# Altium PCB McuProFinal.PcbDoc
Units mil, origin at the board's own origin, x right, y up, seen from the top; angles counter-clockwise.
Board outline 3025 x 3900 mil, 2 copper layers (Top Layer, Bottom Layer); 34 components, 101 nets, 286 pads, 34 vias.
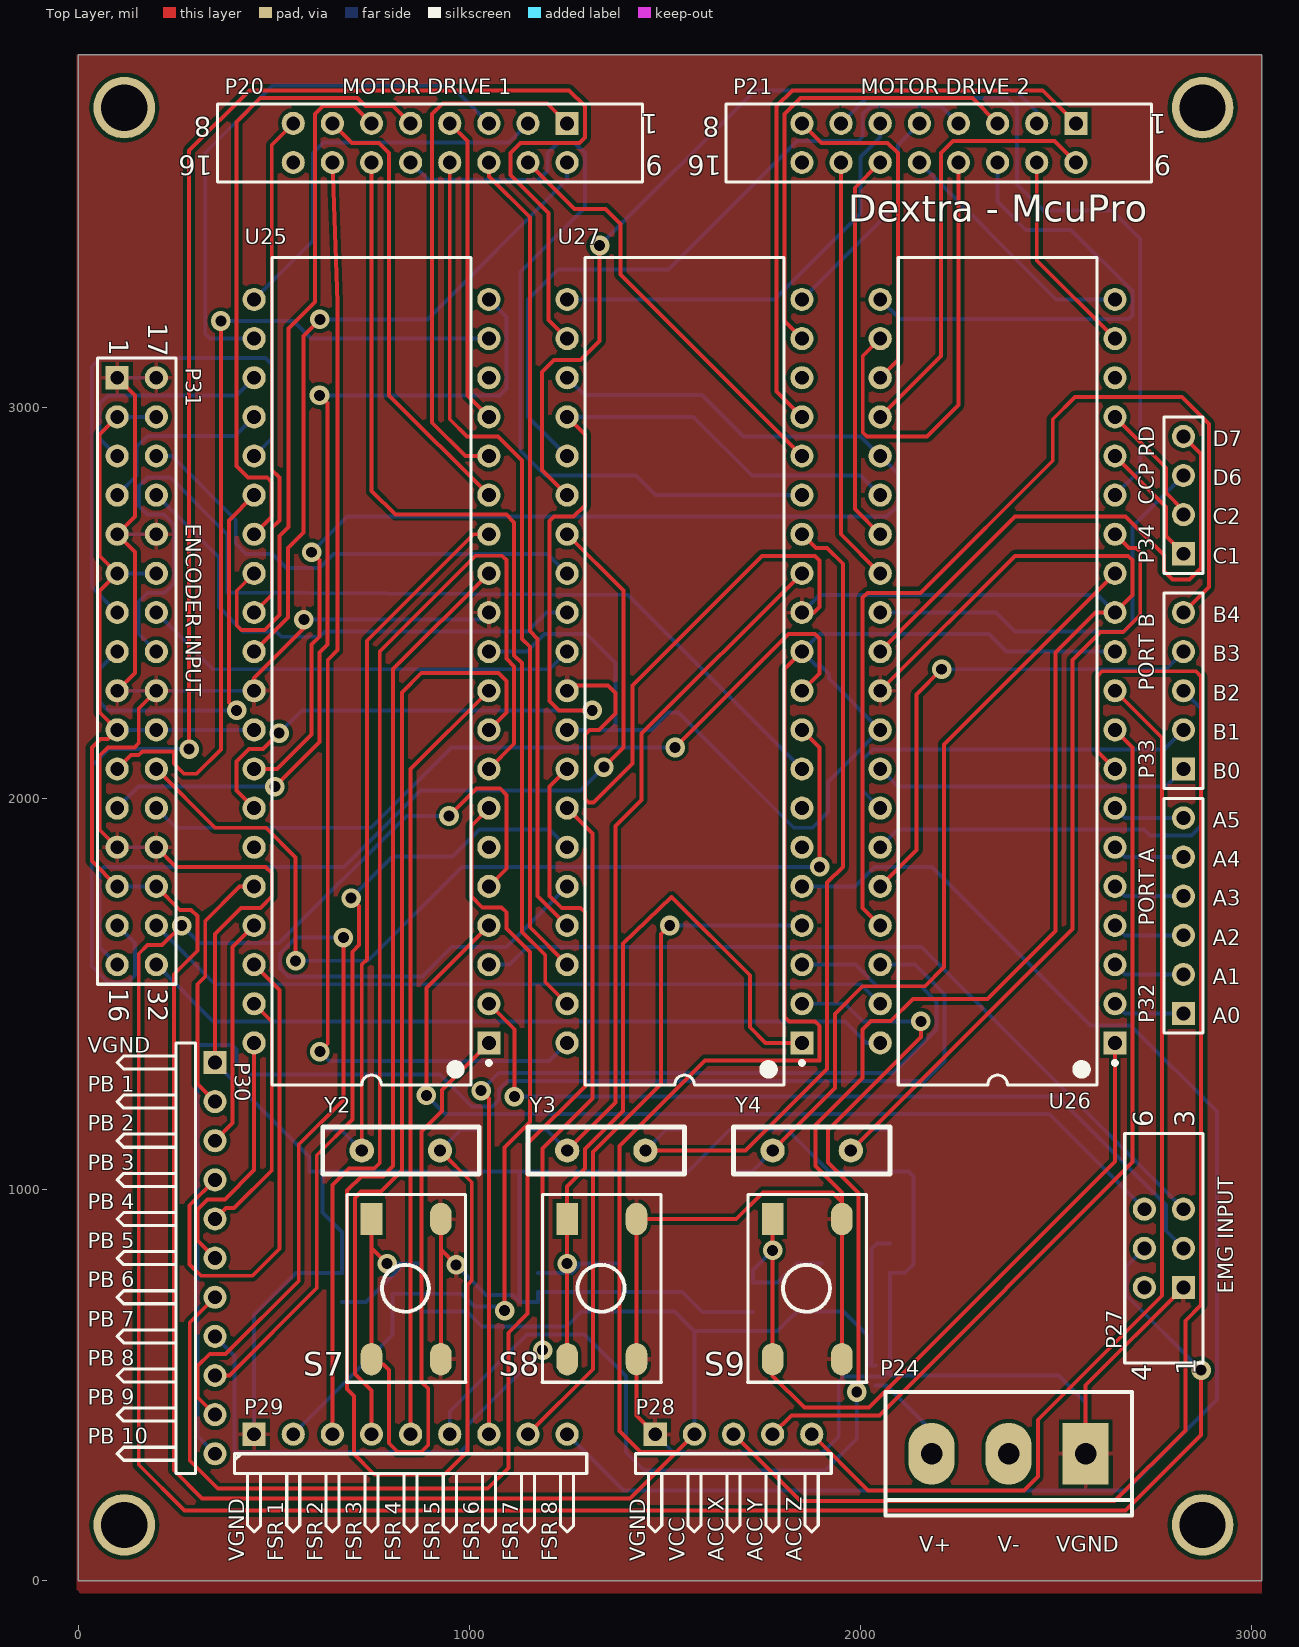
[diagram p0: Top Layer view]
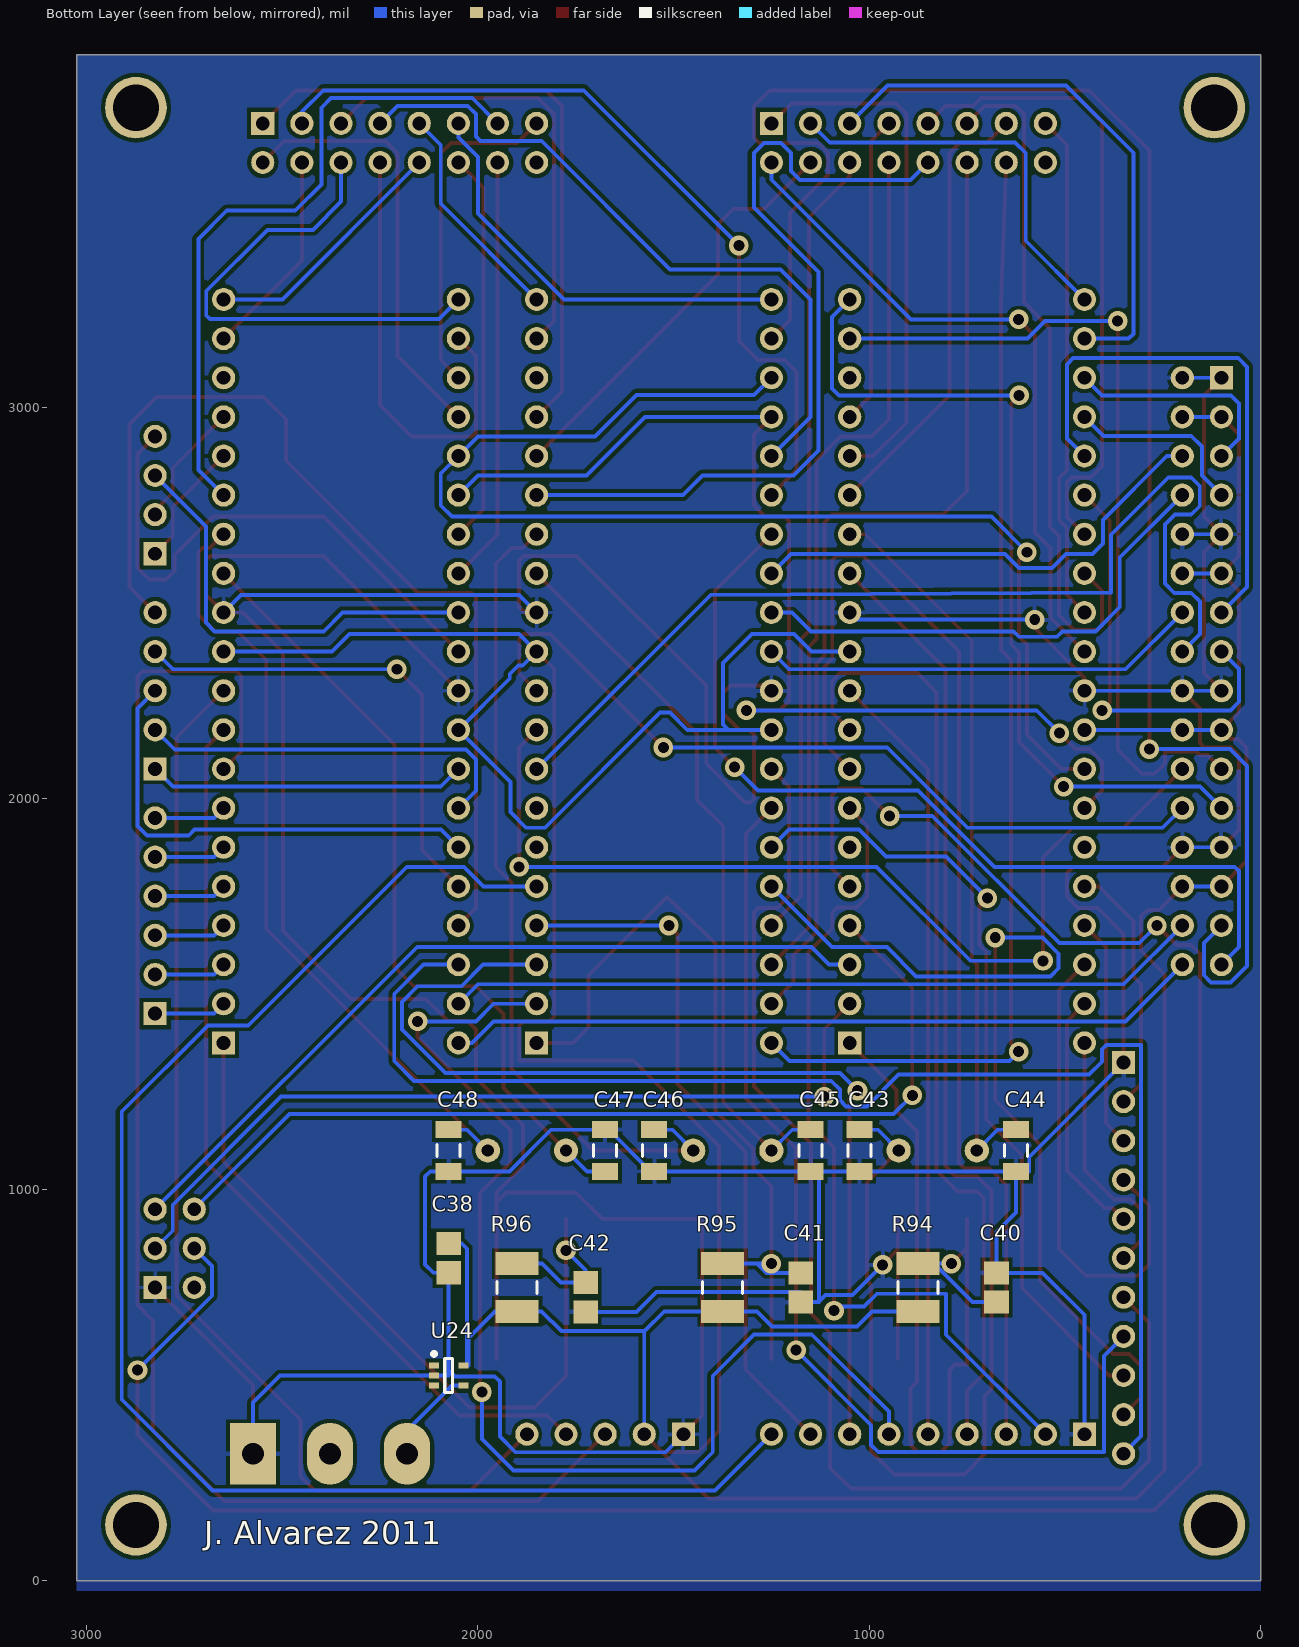
[diagram p1: Bottom Layer view, seen from below]

## Layer stack, top to bottom
Top Layer: signal copper 1.4
Dielectric: dielectric 12.6, FR-4, Dk 4.8
Bottom Layer: signal copper 1.4

## Board outline
0,0 3025,0 3025,3900 0,3900 0,0

## Design rules (kind name [scope] priority, off if disabled: settings)
Clearance [All] p1: gap=10
PolygonConnect [All] p1: connectstyle=Relief reliefconductorwidth=10 reliefentries=4 polygonreliefangle="90 Angle"
RoomDefinition McuPro [InComponentClass('McuPro')] p1: confinementstyle=ConfineIn formatcopy=TRUE lockcomponents=FALSE outline -2.95,-31.1 3025,-31.1 3025,3900 -2.95,3900
RoutingVias [All] p1: holewidth=28 width=50 viastyle="Through Hole" minholewidth=28 minwidth=50 maxholewidth=28 maxwidth=50
SilkToSilkClearance [All] p1: silktosilkclearance=0
SilkscreenOverComponentPads [All] p1: minsilkscreentomaskgap=10
SolderMaskExpansion [All] p1: expansion=4
ViasUnderSMD [All] p1: allowed=FALSE
Width [All] p1: maxlimit=10 minlimit=10 preferedwidth=10
26 further rules are at their usual default settings.

## Components (designator, comment, footprint, x,y, rotation, side; value= is the part's Value field where it differs from the comment)
C38 "Cap Semi" CAPC2012M 2075,825 r270 bottom
C40 "Cap Semi" CAPC2012M 675,750 r90 bottom
C41 "Cap Semi" CAPC2012M 1175,750 r270 bottom
C42 "Cap Semi" CAPC2012M 1725,725 r270 bottom
C43 "Cap Semi" C1206 1025,1100 r270 bottom
C44 "Cap Semi" C1206 625,1100 r270 bottom
C45 "Cap Semi" C1206 1150,1100 r270 bottom
C46 "Cap Semi" C1206 1550,1100 r270 bottom
C47 "Cap Semi" C1206 1675,1100 r90 bottom
C48 "Cap Semi" C1206 2075,1100 r270 bottom
P20 "SHEADER 2x8" "SHBH 2X8" 1250,3725 r180 top
P21 "SHEADER 2x8" "SHBH 2X8" 2550,3725 r180 top
P24 "VIN" AZUL5-3 2575,325 r180 top
P27 "EMG IN" "SHBH 2x3" 2825,750 r90 top
P28 "ACC SENS" HDR1X5H 1475,375 r0 top
P29 "FSR IN" HDR1X9H 450,375 r0 top
P30 "PB IN" HDR1X11H 350,1325 r270 top
P31 "ENC IN" HDR2X16_CEN 100,3075 r270 top
P32 "RA PORT" HDR1X6 2825,1450 r90 top
P33 "RB PORT" HDR1X5 2825,2075 r90 top
P34 "CCP RD" HDR1X4 2825,2625 r90 top
R94 "Res3" RESC3225M 875,750 r90 bottom
R95 "Res3" RESC3225M 1375,750 r90 bottom
R96 "Res3" RESC3225M 1900,750 r90 bottom
S7 "SW BT SMT" "PBOTTON SMT4" 750,925 r0 top
S8 "SW BT SMT" "PBOTTON SMT4" 1250,925 r0 top
S9 "SW BT SMT" "PBOTTON SMT4" 1775,925 r0 top
U24 "TPS71550" SOT353-5L 2075,525 r180 bottom
U25 "PIC18F4553-I/P" PDIP600-P40 750,2325 r180 top
U26 "PIC18F4553-I/P" PDIP600-P40 2350,2325 r180 top
U27 "PIC18F4553-I/P" PDIP600-P40 1550,2325 r180 top
Y2 "XTAL" XTAL-1 925,1100 r180 top
Y3 "XTAL" XTAL-1 1250,1100 r0 top
Y4 "XTAL" XTAL-1 1775,1100 r0 top

## Footprints (in the part's own frame and the unit in brackets; to place one, negate y for a bottom-side part, rotate by r counter-clockwise, add the part's x,y. Pads: shape width x height; smd on the part's side, far side on the other; paste and mask are expansions set on the pad)
AZUL5-3 [mm]
  rect 3x4 hole 1.4: 1(0,0)
  oval 3x4 hole 1.4: 2(5,0) 3(10,0)
  silkscreen extent -3,-4 13,4
C1206 [mm] "Chip Capacitor, Body 3.2x1.6mm, IPC High Density"
  rect 1.1x1.7 smd: 1(-1.35,0) 2(1.35,0)
  silkscreen extent -0.4,-0.75 0.4,0.75, body extent -1.7,-0.9 1.7,0.9, height 1.3
CAPC2012M [mm] "Chip Capacitor, Body 2.0x1.3mm, IPC Low Density"
  rect 1.5x1.6 smd: 1(-0.95,0) 2(0.95,0)
  body extent -1.1,-0.72 1.1,0.72, height 1.1
HDR1X4 [mm] "Connector; Header; 4 Position"
  rect 1.5x1.5 hole 0.9: 1(0,0)
  round 1.5 hole 0.9: 2(2.54,0) 3(5.08,0) 4(7.62,0)
  silkscreen extent -1.27,-1.27 8.89,1.27
HDR1X5 [mm] "Connector; Header; 5 Position"
  rect 1.5x1.5 hole 0.9: 1(0,0)
  round 1.5 hole 0.9: 2(2.54,0) 3(5.08,0) 4(7.62,0) 5(10.16,0)
  silkscreen extent -1.27,-1.27 11.43,1.27
HDR1X5H [mm] "Connector; Header; 5 Position; Right Angle"
  rect 1.5x1.5 hole 0.9: 1(0,0)
  round 1.5 hole 0.9: 2(2.54,0) 3(5.08,0) 4(7.62,0) 5(10.16,0)
  silkscreen extent -1.27,-6.35 11.43,-1.27
HDR1X6 [mm] "Connector; Header; 6 Position"
  rect 1.5x1.5 hole 0.9: 1(0,0)
  round 1.5 hole 0.9: 2(2.54,0) 3(5.08,0) 4(7.62,0) 5(10.16,0) 6(12.7,0)
  silkscreen extent -1.27,-1.27 13.97,1.27
HDR1X9H [mm] "Connector; Header; 9 Position; Right Angle"
  rect 1.5x1.5 hole 0.9: 1(0,0)
  round 1.5 hole 0.9: 2(2.54,0) 3(5.08,0) 4(7.62,0) 5(10.16,0) 6(12.7,0) 7(15.24,0) 8(17.78,0) 9(20.32,0)
  silkscreen extent -1.27,-6.35 21.59,-1.27
HDR1X11H [mm] "Connector; Header; 11 Position; Right Angle"
  rect 1.5x1.5 hole 0.9: 1(0,0)
  round 1.5 hole 0.9: 2(2.54,0) 3(5.08,0) 4(7.62,0) 5(10.16,0) 6(12.7,0) 7(15.24,0) 8(17.78,0) 9(20.32,0) 10(22.86,0) 11(25.4,0)
  silkscreen extent -1.27,-6.35 26.67,-1.27
HDR2X16_CEN [mm] "Connector; Header; 16x2 Position"
  rect 1.5x1.5 hole 0.9: 1(0,0)
  round 1.5 hole 0.9: 2(2.54,0) 3(5.08,0) 4(7.62,0) 5(10.16,0) 6(12.7,0) 7(15.24,0) 8(17.78,0) 9(20.32,0) 10(22.86,0) 11(25.4,0) 12(27.94,0) 13(30.48,0) 14(33.02,0) 15(35.56,0) 16(38.1,0) 17(0,2.54) 18(2.54,2.54) 19(5.08,2.54) 20(7.62,2.54) 21(10.16,2.54) 22(12.7,2.54) 23(15.24,2.54) 24(17.78,2.54) 25(20.32,2.54) 26(22.86,2.54) 27(25.4,2.54) 28(27.94,2.54) 29(30.48,2.54) 30(33.02,2.54) 31(35.56,2.54) 32(38.1,2.54)
  silkscreen extent -1.27,-1.27 39.37,3.81
"PBOTTON SMT4" [mm]
  oval 1.4x2.1 smd: 1(0,-9.1) 2(4.5,-9.1) 2(4.5,0)
  rect 1.4x2.1 smd: 1(0,0)
  silkscreen extent -1.6,-10.6 6.1,1.6
PDIP600-P40 [mm] "DIP, 40-Leads, Row Spacing 15.24mm, Pitch 2.54mm, Body 51.8x13.5mm"
  rect 1.5x1.5 hole 0.9: 1(-7.62,24.13)
  round 1.5 hole 0.9: 2(-7.62,21.59) 3(-7.62,19.05) 4(-7.62,16.51) 5(-7.62,13.97) 6(-7.62,11.43) 7(-7.62,8.89) 8(-7.62,6.35) 9(-7.62,3.81) 10(-7.62,1.27) 11(-7.62,-1.27) 12(-7.62,-3.81) 13(-7.62,-6.35) 14(-7.62,-8.89) 15(-7.62,-11.43) 16(-7.62,-13.97) 17(-7.62,-16.51) 18(-7.62,-19.05) 19(-7.62,-21.59) 20(-7.62,-24.13) 21(7.62,-24.13) 22(7.62,-21.59) 23(7.62,-19.05) 24(7.62,-16.51) 25(7.62,-13.97) 26(7.62,-11.43) 27(7.62,-8.89) 28(7.62,-6.35) 29(7.62,-3.81) 30(7.62,-1.27) 31(7.62,1.27) 32(7.62,3.81) 33(7.62,6.35) 34(7.62,8.89) 35(7.62,11.43) 36(7.62,13.97) 37(7.62,16.51) 38(7.62,19.05) 39(7.62,21.59) 40(7.62,24.13)
  silkscreen extent -7.75,-26.85 6.45,26.85, body extent -7.3,-26.85 7.3,26.85, height 6.35
RESC3225M [mm] "Chip Resistor, Body 3.2x2.5mm, IPC Low Density"
  rect 1.5x2.8 smd: 1(-1.55,0) 2(1.55,0)
  silkscreen extent -0.4,-1.3 0.4,1.3, body extent -1.68,-1.32 1.68,1.32, height 0.71
"SHBH 2x3" [mm] "Shrouded Box Header: 2x3-Pin, 0.100\" (2.54 mm) Male"
  rect 1.5x1.5 hole 0.9: 1(0,0)
  round 1.5 hole 0.9: 2(2.54,0) 3(5.08,0) 4(0,2.54) 5(2.54,2.54) 6(5.08,2.54)
  silkscreen extent -4.9,-1.27 10,3.81
"SHBH 2X8" [mm] "Shrouded Box Header: 2x8-Pin, 0.100\" (2.54 mm) Male"
  rect 1.5x1.5 hole 0.9: 1(0,0)
  round 1.5 hole 0.9: 2(2.54,0) 3(5.08,0) 4(7.62,0) 5(10.16,0) 6(12.7,0) 7(15.24,0) 8(17.78,0) 9(0,2.54) 10(2.54,2.54) 11(5.08,2.54) 12(7.62,2.54) 13(10.16,2.54) 14(12.7,2.54) 15(15.24,2.54) 16(17.78,2.54)
  silkscreen extent -4.9,-1.27 22.7,3.81
SOT353-5L [mm] "SOT353, 5-Leads, Body 2x1.3mm, Pitch 0.65mm, Lead Span 2.1mm, IPC High Density"
  rect 0.65x0.4 smd: 1(-0.95,0.65) 2(-0.95,0) 3(-0.95,-0.65) 4(0.95,-0.65) 5(0.95,0.65)
  silkscreen extent -1.07,-1.1 0.25,1.52, body extent -0.7,-1.1 0.7,1.1, height 1.1
XTAL-1 [mil]
  round 62 hole 31.5: 1(0,0) 2(200,0)
  silkscreen extent -100,-60 300,60

## Part data
C38 C40 C41 C42 C43 C44 C45 C46 C47 C48: "Capacitor (Semiconductor SIM Model)"
P20 P21: library part "SB Header 2x8", "Shrouded Box Header: 2x8-Pin, 0.100\" (2.54 mm) Male"
P24: library part "Header 3", "Header, 3-Pin"
P27: library part "SB Header 2x3", "Shrouded Box Header: 2x8-Pin, 0.100\" (2.54 mm) Male"
P28: library part "Header 5H", "Header, 5-Pin, Right Angle"
P29: library part "Header 9H", "Header, 9-Pin, Right Angle"
P30: library part "Header 11H", "Header, 11-Pin, Right Angle"
P31: library part "Header 16X2A", "Header, 16-Pin, Dual row"
P32: library part "Header 6", "Header, 6-Pin"
P33: library part "Header 5", "Header, 5-Pin"
P34: library part "Header 4", "Header, 4-Pin"
R94 R95 R96: "Resistor"
S7 S8 S9: library part "SW PB 6mm", "Pushbutton Switches FSM2JSMAASTR=6MM TACT SWITCH,"
U25 U26 U27: "High Performance, Enhanced Flash, USB Microcontroller with 12-Bit A/D and nanoWatt Technology, 32K Flash, 40-Pin PDIP, Industrial Temperature Range"
Y2 Y3 Y4: "Crystal Oscillator"

## Free pads (board coordinates)
  round 157.48 hole 118.11: 0(118.11,143.11) 2(118.11,3765.16) 3(2874.02,3765.16) 4(2874.02,143.11)

## Via types
v1: diameter 50, hole 28, Top Layer to Bottom Layer, 34 vias

## Nets (pads, with @x,y where several pads share a name; then routed paths per layer and width w, separated by ;. In a path a pad name is that pad's centre, name@x,y a point inside that pad or via, vN(x,y) a via of type N, cw(c..) or ccw(c..) an arc to the next point about the centre after c; other vN are vias at no path point)
"ACC X": P28.3 U26.8 | length 3776.3
  Top Layer w10: P28.3 1846.1,203.9 2649.05,203.9 2830.05,384.9 2830.05,665 2870.05,705 2870.05,2311.9 2857.05,2324.9 2617.05,2324.9 2605.05,2312.9 2605.05,2119.95 U26.8
"ACC Y": P28.4 U26.9 | length 2331.5
  Top Layer w10: P28.4 1822.9,422.9 2047.8,422.9 2695.05,1070.14 2695.05,2129.95 U26.9
"ACC Z": P28.5 U26.10 | length 2841.8
  Top Layer w10: P28.5 2019.1,230.9 2417.05,230.9 2453.05,266.9 2453.05,411.9 2770.05,728.9 2770.05,2154.95 U26.10
EMGCH1: P27.2 U25.2 | length 2173.3
  Top Layer w10: U25.2 1115.05,1409.95 v1(1115.05,1237.9)
  Bottom Layer w10: v1(1115.05,1237.9) 2503.05,1237.9 2780.05,960.9 2780.05,894.95 P27.2
EMGCH2: P27.3 U25.3 | length 2071.1
  Bottom Layer w10: U25.3 1103.15,1575 1148.05,1619.9 2155.1,1619.9 P27.3
EMGCH3: P27.6 U25.4 | length 2455.8
  Top Layer w10: v1(890.05,1240.9) 890.05,1515.05 U25.4
  Bottom Layer w10: v1(890.05,1240.9) 938.05,1192.9 2482.1,1192.9 P27.6
EMGCH4: P27.5 U25.5 | length 6135.1
  Top Layer w10: v1(265.05,1674.9) 215.05,1624.9 177.05,1624.9 155.05,1602.9 155.05,296.9 272.05,179.9 2677.05,179.9 2870.05,372.9 v1(2870.05,538.9) ; v1(948.05,1954.9) 1018.05,2024.9 1079.05,2024.9 1095.05,2008.9 1095.05,1820.05 U25.5
  Bottom Layer w10: v1(265.05,1674.9) 310.05,1629.9 514.05,1629.9 839.05,1954.9 v1(948.05,1954.9) ; P27.5 2680.05,805.05 2680.05,728.9 v1(2870.05,538.9)
EN1CHA: P31.3 U25.23 | length 574.9
  Bottom Layer w10: P31.3 55.05,2919.95 55.05,3008.9 76.05,3029.9 404.9,3029.9 U25.23
EN1CHB: P31.4 U25.24 | length 476.1
  Bottom Layer w10: P31.4 150.05,2825.05 150.05,2898.9 177.05,2925.9 400.9,2925.9 U25.24
EN2CHA: P31.7 U25.25 | length 1383.1
  Bottom Layer w10: P31.7 35.05,2539.95 35.05,3102.9 57.05,3124.9 479.05,3124.9 495.05,3108.9 495.05,2920.05 U25.25
EN2CHB: P31.8 U25.26 | length 1090.8
  Top Layer w10: v1(405.05,2224.9) 385.47,2244.47 385.47,2710.47 U25.26
  Bottom Layer w10: P31.8 55.05,2330.05 55.05,2246.9 77.05,2224.9 v1(405.05,2224.9)
EN3CHA: P31.11 U25.19 | length 2149.1
  Top Layer w10: P31.11 135.47,2110.47 155.1,2110.47 164.53,2119.9 243.53,2119.9 244.53,2118.9 244.53,2088.9 270.53,2062.9 303.05,2062.9 365.05,2124.9 v1(365.05,3219.9)
  Bottom Layer w10: v1(365.05,3219.9) 550.92,3219.9 595.82,3175 U25.19
EN3CHB: P31.12 U25.20 | length 2220.8
  Top Layer w10: v1(503.05,2029.9) 617.05,2143.9 617.05,2373.09 637.05,2393.09 637.05,3009.9 v1(617.05,3029.9)
  Bottom Layer w10: P31.12 154.9,2029.9 v1(503.05,2029.9) ; v1(617.05,3029.9) 1077.05,3029.9 1095.05,3047.9 1095.05,3229.95 U25.20
EN4CHA: P31.15 U27.22 | length 4500.4
  Top Layer w10: v1(284.05,2125.9) 284.05,3655.9 437.68,3809.53 1254.42,3809.53 1295.05,3768.9 1295.05,3688.9 1281.05,3674.9 1131.05,3674.9 1105.05,3648.9 1105.05,3592.9 1202.05,3495.9 1202.05,3222.95 U27.22
  Bottom Layer w10: P31.15 145.05,1629.95 145.05,1547.9 127.05,1529.9 77.05,1529.9 35.05,1571.9 35.05,2082.9 78.05,2125.9 v1(284.05,2125.9)
EN4CHB: P31.16 U27.27 | length 2332.2
  Top Layer w10: U27.27 1394.05,2530.95 1394.05,2129.9 v1(1344.05,2079.9)
  Bottom Layer w10: P31.16 55.05,1619.95 55.05,1813.9 66.05,1824.9 680.05,1824.9 875.05,2019.9 1284.05,2019.9 v1(1344.05,2079.9)
EN5CHA: P31.19 U27.28 | length 1239.7
  Bottom Layer w10: P31.19 239.76,2875 403.03,2711.73 403.03,2650.92 429.05,2624.9 497.05,2624.9 533.05,2588.9 617.05,2588.9 653.05,2624.9 1200.1,2624.9 U27.28
EN5CHB: P31.20 U27.29 | length 1299.5
  Bottom Layer w10: P31.20 359.95,2615.05 359.95,2488.9 421.95,2426.9 506.14,2426.9 519.95,2413.09 617.05,2413.09 630.86,2426.9 1149.05,2426.9 1197.15,2475 U27.29
EN6CHA: P31.23 U27.30 | length 1128.8
  Bottom Layer w10: P31.23 345.1,2329.9 1204.9,2329.9 U27.30
EN6CHB: P31.24 U27.8 | length 2662.1
  Bottom Layer w10: P31.24 155.05,2419.95 155.05,2502.9 177.05,2524.9 220.53,2524.9 244.53,2548.9 244.53,2699.42 219.05,2724.9 177.05,2724.9 155.47,2746.47 155.47,2798.32 177.05,2819.9 235.88,2819.9 382.05,2673.73 382.05,2525.9 1405.1,2519.9 U27.8
EN7CHA: P31.27 U27.9 | length 2520.9
  Top Layer w10: P31.27 350.1,1924.9 480.05,1924.9 556.05,1848.9 v1(556.05,1584.9) ; U27.9 1895.05,2129.95 v1(1895.05,1824.9)
  Bottom Layer w10: v1(556.05,1584.9) 741.05,1584.9 981.05,1824.9 v1(1895.05,1824.9)
EN7CHB: P31.28 U27.10 | length 2077.2
  Top Layer w10: v1(1526.05,2129.9) 1816.05,2419.9 1883.53,2419.9 1894.53,2408.9 1894.53,2319.53 U27.10
  Bottom Layer w10: P31.28 250.1,1924.9 749.05,1924.9 954.05,2129.9 v1(1526.05,2129.9)
EN8CHA: P31.31 U26.39 | length 1932.8
  Bottom Layer w10: P31.31 350.1,1524.9 2000.1,1524.9 U26.39
EN8CHB: P31.32 U26.40 | length 1932.8
  Bottom Layer w10: P31.32 345.1,1429.9 1960.57,1429.9 2015.47,1375 U26.40
EN11: P20.1 U25.16 | length 1346.3
  Top Layer w10: U25.16 990.05,2875 905.05,2960 905.05,3748.9 932.05,3775.9 1199.1,3775.9 P20.1
EN12: P20.4 U25.17 | length 791.4
  Top Layer w10: P20.4 995.05,3679.95 995.05,3029.95 U25.17
EN21: P20.7 U25.15 | length 1156.1
  Top Layer w10: P20.7 700.1,3674.9 769.05,3674.9 795.05,3648.9 795.05,3029.95 U25.15
EN22: P20.10 U27.16 | length 1086
  Top Layer w10: P20.10 1268.89,3506.11 1347.54,3506.11 1386.19,3467.47 1386.19,3338.81 U27.16
EN31: P20.13 U27.15 | length 2136.3
  Bottom Layer w10: P20.13 895.1,3579.9 1177.05,3579.9 1200.05,3602.9 1200.05,3648.9 1226.05,3674.9 1269.05,3674.9 1295.05,3648.9 1295.05,3509.9 1130.05,3344.9 1130.05,2888.9 1194.05,2824.9 1426.15,2824.9 1476.05,2775 U27.15
EN32: P21.1 U27.17 | length 1637
  Top Layer w10: U27.17 1785.47,3039.53 1785.47,3768.9 1826.1,3809.53 2465.47,3809.53 P21.1
EN41: P21.4 U27.25 | length 1798.3
  Bottom Layer w10: U27.25 1150.05,2974.95 1150.05,3274.9 1227.05,3351.9 1509.05,3351.9 1837.05,3679.9 1994.05,3679.9 2005.47,3691.32 2005.47,3748.9 2026.1,3769.53 2205.47,3769.53 P21.4
EN42: P21.7 U26.15 | length 1736.4
  Bottom Layer w10: P21.7 2014.53,3789.53 2375.42,3789.53 2400.05,3764.9 2400.05,3568.9 2467.05,3501.9 2642.05,3501.9 2714.53,3429.42 2714.53,2839.53 U26.15
EN51: P21.10 U26.19 | length 532.8
  Top Layer w10: P21.10 2450,3375 U26.19
EN52: P21.13 U26.20 | length 645
  Bottom Layer w10: P21.13 2500,3275 U26.20
FSR1: P29.2 U25.7 | length 2188.7
  Top Layer w10: U25.7 1005.05,1930.05 1005.05,1748.9 1033.05,1720.9 1082.53,1720.9 1094.53,1708.9 1094.53,1667.9 1155.05,1607.38 1155.05,1172.9 1090.05,1107.9 v1(1090.05,690.9)
  Bottom Layer w10: P29.2 804.05,629.05 804.05,733.9 980.05,733.9 1013.05,700.9 1080.05,700.9 v1(1090.05,690.9)
FSR2: P29.3 U25.8 | length 3086.5
  Top Layer w10: P29.3 650,1011.85 692.15,1054 757.05,1054 771,1067.95 771,2374.85 1016.05,2619.9 1083.53,2619.9 1094.53,2608.9 1094.53,2356.9 1114.53,2336.9 1114.53,2139.53 U25.8
FSR3: P29.4 U25.9 | length 2431.5
  Top Layer w10: P29.4 750,486.34 707.44,528.9 707.44,978.9 723.44,994.9 774.05,994.9 828.05,1048.9 828.05,2270.9 877.05,2319.9 1074.53,2319.9 1094.53,2299.9 1094.53,2219.53 U25.9
FSR4: P29.5 U25.10 | length 1982.8
  Top Layer w10: P29.5 850,2075 U25.10
FSR5: P29.6 U27.2 | length 2993.7
  Top Layer w10: v1(1990.05,482.9) 1995.05,487.9 1995.05,990.9 1917.05,1068.9 1917.05,1152.9 2154.05,1389.9 v1(2154.05,1429.9)
  Bottom Layer w10: P29.6 950,432.85 1147.05,629.9 1294.05,629.9 1400.05,523.9 1400.05,328.9 1447.05,281.9 1909.05,281.9 1990.05,362.9 v1(1990.05,482.9) ; U27.2 1960.37,1475 2005.47,1429.9 v1(2154.05,1429.9)
FSR6: P29.7 U27.3 | length 2569.2
  Top Layer w10: v1(1030.05,1252.9) 1050,1232.95 P29.7
  Bottom Layer w10: v1(1030.05,1252.9) 1075.05,1297.9 2083.05,1297.9 2194.05,1408.9 2194.05,1479.9 2154.05,1519.9 2042.05,1519.9 1986.95,1575 U27.3
FSR7: P29.8 U27.4 | length 1787.9
  Top Layer w10: P29.8 1316,541 1316,1095.85 1490.05,1269.9 1490.05,1652.9 v1(1512.15,1675)
  Bottom Layer w10: v1(1512.15,1675) U27.4
FSR8: P29.9 U27.5 | length 3892.7
  Bottom Layer w10: P29.9 1394.1,230.9 2678.05,230.9 2910.34,463.19 2910.34,1199.61 2690.05,1419.9 2587.05,1419.9 2182.05,1824.9 2035.95,1824.9 1986.05,1775 U27.5
IN11: P20.2 U25.21 | length 1017.5
  Bottom Layer w10: U25.21 600.05,3425.05 600.05,3648.9 627.05,3675.9 1100.9,3675.9 P20.2
IN12: P20.3 U25.22 | length 1429.2
  Bottom Layer w10: U25.22 337.05,3175 325.05,3187 325.05,3649.9 497.05,3821.9 953.1,3821.9 P20.3
IN13: P20.5 U25.27 | length 1635.2
  Top Layer w10: U25.27 494.53,2719.53 494.53,2808.9 483.53,2819.9 434.05,2819.9 405.05,2848.9 405.05,3728.9 465.68,3789.53 714.53,3789.53 734.16,3769.9 805.1,3769.9 P20.5
IN14: P20.6 U25.28 | length 1771.2
  Top Layer w10: U25.28 405.47,2530.47 405.47,2442.05 417.05,2430.47 477.05,2430.47 515.05,2468.47 515.05,2670.9 538.05,2693.9 538.05,3201.06 605.05,3268.06 605.05,3748.9 625.68,3769.53 705.47,3769.53 P20.6
IN21: P20.8 U25.29 | length 1307.6
  Top Layer w10: U25.29 495.05,2520.05 495.05,2690.99 514.53,2710.47 514.53,2820.05 495.05,2839.53 495.05,3670.05 P20.8
IN22: P20.9 U25.30 | length 1742.4
  Top Layer w10: U25.30 537.05,2462.05 537.05,2639.9 576.05,2678.9 576.05,3181.9 v1(618.05,3223.9)
  Bottom Layer w10: v1(618.05,3223.9) 893,3223.9 1250,3580.9 P20.9
IN23: P20.11 U27.37 | length 2032.8
  Top Layer w10: P20.11 1050,3589.58 1154.53,3485.05 1154.53,2427.37 1174.53,2407.37 1174.53,1750.47 U27.37
IN24: P20.12 U27.38 | length 2220.6
  Top Layer w10: P20.12 950,2968.9 994,2924.9 1073.05,2924.9 1134.53,2863.42 1134.53,2407.37 1154.53,2387.37 1154.53,1670.47 U27.38
IN31: P20.14 U27.39 | length 2523.5
  Top Layer w10: P20.14 750,2785.95 811.05,2724.9 1095.05,2724.9 1114.53,2705.42 1114.53,2365.47 1134.53,2345.47 1134.53,1658.9 1194.05,1599.38 1194.05,1530.95 U27.39
IN32: P20.15 U27.40 | length 2952
  Top Layer w10: v1(618.05,1352.9) 638.05,1372.9 638.05,2354.09 663.05,2379.09 663.05,3268.06 P20.15
  Bottom Layer w10: v1(618.05,1352.9) 642.03,1328.92 1203.92,1328.92 U27.40
IN33: P21.2 U27.26 | length 2099.4
  Top Layer w10: U27.26 1185.47,2839.53 1185.47,3089.32 1216.05,3119.9 1284.05,3119.9 1333.05,3168.9 v1(1333.05,3412.9)
  Bottom Layer w10: v1(1333.05,3412.9) 1729.68,3809.53 2395.42,3809.53 2450,3754.95 P21.2
IN34: P21.3 U27.19 | length 1180.4
  Top Layer w10: U27.19 1805.47,3219.53 1805.47,3748.9 1846.1,3789.53 2285.47,3789.53 P21.3
IN41: P21.5 U27.20 | length 574.3
  Bottom Layer w10: U27.20 2095.05,3520.05 2095.05,3670.05 P21.5
IN42: P21.6 U27.21 | length 1091.9
  Bottom Layer w10: U27.21 1780.15,3275 2000.05,3494.9 2000.05,3638.72 2050,3688.67 P21.6
IN43: P21.8 U26.23 | length 869.1
  Top Layer w10: P21.8 1900.1,3674.9 2069.05,3674.9 2095.05,3648.9 2095.05,3120.05 U26.23
IN44: P21.9 U26.24 | length 1118.4
  Top Layer w10: U26.24 2205.47,3130.47 2205.47,3648.9 2236.47,3679.9 2495.1,3679.9 P21.9
IN51: P21.11 U26.21 | length 1270.5
  Bottom Layer w10: U26.21 2100.1,3224.9 2685.05,3224.9 2694.53,3234.38 2694.53,3296.42 2538.05,3452.9 2422.05,3452.9 2350,3524.95 P21.11
IN52: P21.12 U26.22 | length 1160.1
  Top Layer w10: U26.22 2005.47,3130.47 2005.47,2935.47 2016.05,2924.9 2170.05,2924.9 2250,3004.85 P21.12
IN53: P21.14 U26.27 | length 1003.5
  Top Layer w10: U26.27 1985.47,2739.53 1985.47,3560.47 P21.14
IN54: P21.15 U26.28 | length 1091.4
  Top Layer w10: P21.15 1950,2675 U26.28
"MCLR 11": C40.1 R94.2 S7.1 U25.1 | length 2173.4
  Top Layer w10: S7.1@750,925 750,851.02 ; v1(790,811.02) 750,851.02 ; U25.1 930.05,1255.05 930.05,1200.9 878.05,1148.9 878.05,508.9 895.05,491.9 895.05,347.9 877.05,329.9 817.05,329.9 795.05,351.9 795.05,538.9 781.05,552.9 750,552.9 750,566.73 750,851.02
  Bottom Layer w10: C40.1 735.78,712.6 R94.2@834.21,811.02 ; v1(790,811.02) R94.2@834.21,811.02 ; R94.2 R94.2@834.21,811.02
"MCLR 21": C41.1 R95.2 S8.1 U27.1 | length 2105
  Top Layer w10: S8.1@1250,566.73 v1(1250,811.02) 1250,925 1250,1007.9 1296,1053.9 1296,1104.14 1393.05,1201.18 1393.05,1628.9 1517.05,1747.9 1717.05,1547.9 1717.05,1415 1757.05,1375 U27.1
  Bottom Layer w10: C41.1 1263.05,787.4 1286.67,811.02 ; v1(1250,811.02) 1286.67,811.02 ; R95.2 1286.67,811.02
"MCLR 31": C42.1 R96.2 S9.1 U26.1 | length 2171.7
  Top Layer w10: S9.1@1775,925 v1(1775,844.9) 1775,566.73 1775,523.95 1856.05,442.9 2021.17,442.9 2650,1071.73 U26.1
  Bottom Layer w10: v1(1775,844.9) 1725,794.9 C42.1 1788.05,762.4 1836.67,811.02 R96.2
"OSC 11": C43.1 U25.13 Y2.1 | length 3706
  Top Layer w10: Y2.1 1006.05,1018.95 1006.05,767.47 995.05,756.47 995.05,330.9 936.05,271.9 757.05,271.9 705.05,323.9 705.05,472.78 687.44,490.39 687.44,997.29 724.15,1034 779.13,1034 805.05,1059.91 805.05,2330.05 U25.13
  Bottom Layer w10: Y2.1 978.15,1153.15 C43.1
"OSC 12": C44.1 U25.14 Y2.2 | length 1854.9
  Top Layer w10: Y2.2 725,1575.2 738.05,1588.25 738.05,2402.83 1010.21,2675 U25.14
  Bottom Layer w10: C44.1 671.85,1153.15 Y2.2
"OSC 21": C45.1 U27.13 Y3.1 | length 1845.5
  Top Layer w10: Y3.1 1373.05,1223.05 1373.05,1928.9 1440.46,1996.31 1440.46,2165.46 U27.13
  Bottom Layer w10: C45.1 1196.85,1153.15 Y3.1
"OSC 22": C46.1 U27.14 Y3.2 | length 2116.4
  Top Layer w10: Y3.2 1706.15,1100 1914.53,1308.38 1914.53,1785 1954.53,1825 1954.53,2599.53 1914.53,2639.53 1885.47,2639.53 U27.14
  Bottom Layer w10: Y3.2 1503.15,1153.15 C46.1
"OSC 31": C47.1 U26.13 Y4.1 | length 2052.6
  Top Layer w10: Y4.1 1934.53,1259.53 1934.53,1449.38 2005.05,1519.9 2164.05,1519.9 2213.05,1568.9 2213.05,2138.05 U26.13
  Bottom Layer w10: C47.1 1721.85,1046.85 Y4.1
"OSC 32": C48.1 U26.14 Y4.2 | length 2075
  Top Layer w10: Y4.2 2541.05,1666.05 2541.05,2353.25 2612.7,2424.9 2671.05,2424.9 2714.53,2468.38 2714.53,2628.9 2703.9,2639.53 2685.47,2639.53 U26.14
  Bottom Layer w10: Y4.2 2028.15,1153.15 C48.1
PB1: P30.2 U25.36 | length 650.3
  Top Layer w10: P30.2 305.05,1269.95 305.05,1524.9 325.05,1544.9 325.05,1686.94 413.11,1775 U25.36
PB2: P30.3 U25.37 | length 591.4
  Top Layer w10: P30.3 395.05,1170.05 395.05,1620.05 U25.37
PB3: P30.4 U25.38 | length 1266.6
  Top Layer w10: P30.4 285.05,960.05 285.05,808.9 314.05,779.9 446.05,779.9 515.05,848.9 515.05,1509.95 U25.38
PB4: P30.5 U25.39 | length 640.8
  Top Layer w10: P30.5 378.15,953.15 398.78,953.15 495.05,1049.42 495.05,1429.95 U25.39
PB5: P30.6 U25.40 | length 654.4
  Top Layer w10: P30.6 305.05,869.95 305.05,948.9 331.05,974.9 375.05,974.9 450,1049.85 U25.40
PB6: P30.7 U27.33 | length 3261.3
  Top Layer w10: P30.7 285.47,660.47 285.47,307.47 357.05,235.9 1047.05,235.9 1100.05,288.9 1100.05,634.29 1149.08,683.32 1149.08,1117.65 1295.05,1263.62 1295.05,1708.9 1284.05,1719.9 1236.05,1719.9 1205.05,1750.9 1205.05,2030.05 U27.33
PB7: P30.8 U27.34 | length 2704.9
  Top Layer w10: v1(1187.05,589.9) 1187.05,1104.9 1315.05,1232.9 1315.05,1909.95 U27.34
  Bottom Layer w10: P30.8 400.05,574.95 400.05,329.9 977.05,329.9 995.05,347.9 995.05,397.9 v1(1187.05,589.9)
PB8: P30.9 U27.35 | length 2045.3
  Top Layer w10: P30.9 386.89,525 610.05,748.16 610.05,1087.9 701.05,1178.9 701.05,1607.9 718.05,1624.9 718.05,1724.9 v1(698.05,1744.9)
  Bottom Layer w10: v1(698.05,1744.9) 804.05,1850.9 957.05,1850.9 1026.05,1919.9 1205.1,1919.9 U27.35
PB9: P30.10 U27.36 | length 2469.4
  Top Layer w10: P30.10 305.47,469.53 305.47,548.9 336.47,579.9 377.05,579.9 564.05,766.9 564.05,1114.9 678.05,1228.9 v1(678.05,1643.9)
  Bottom Layer w10: v1(678.05,1643.9) 557.05,1643.9 516.05,1602.9 516.05,1565.9 537.05,1544.9 880.05,1544.9 955.05,1619.9 1094.9,1619.9 U27.36
PB10: P30.11 U26.38 | length 3486.3
  Bottom Layer w10: P30.11 305.05,369.95 305.05,1369.9 394.05,1369.9 405.05,1358.9 405.05,1326.9 438.05,1293.9 925.05,1293.9 1006.05,1212.9 1059.05,1212.9 1075.05,1228.9 1075.05,1255.9 1097.05,1277.9 2163.05,1277.9 2214.05,1328.9 2214.05,1499.9 2138.95,1575 U26.38
PIC11: U25.33 U26.25 U27.23 | length 3241.2
  Top Layer w10: U25.33 508.9,2075 597.05,2163.15 597.05,2393.09 617.05,2413.09 617.05,2608.9 v1(597.05,2628.9)
  Bottom Layer w10: v1(597.05,2628.9) 688.05,2719.9 2066.05,2719.9 2095.05,2748.9 2095.05,2829.95 U26.25 2000.1,2924.9 1701.05,2924.9 1595.05,3030.9 1294.1,3030.9 U27.23
PIC12: U25.34 U26.26 U27.24 | length 2913.9
  Top Layer w10: U25.34 405.05,2019.95 405.05,2093.9 437.05,2125.9 473.05,2125.9 v1(514.05,2166.9) ; U27.24 1295.05,2929.95 1295.05,2748.9 1266.05,2719.9 1216.05,2719.9 1205.05,2708.9 1205.05,2248.9 1229.05,2224.9 v1(1314.05,2224.9)
  Bottom Layer w10: v1(514.05,2166.9) 572.05,2224.9 v1(1314.05,2224.9) ; U27.24 1572.95,2975 1723.05,2824.9 2000.1,2824.9 U26.26
RA0: P32.1 U26.2 | length 185.4
  Bottom Layer w10: U26.2 2675,1450 P32.1
RA1: P32.2 U26.3 | length 185.4
  Bottom Layer w10: U26.3 2675,1550 P32.2
RA2: P32.3 U26.4 | length 185.4
  Bottom Layer w10: U26.4 2675,1650 P32.3
RA3: P32.4 U26.5 | length 185.4
  Bottom Layer w10: U26.5 2675,1750 P32.4
RA4: P32.5 U26.6 | length 185.4
  Bottom Layer w10: U26.6 2675,1850 P32.5
RA5: P32.6 U26.7 | length 185.4
  Bottom Layer w10: U26.7 2675,1950 P32.6
RB0: P33.1 U26.33 | length 812.4
  Bottom Layer w10: U26.33 2095.1,2029.9 2779.9,2029.9 P33.1
RB1: P33.2 U26.34 | length 993.6
  Bottom Layer w10: U26.34 2005.47,2019.53 2005.47,2099.32 2031.05,2124.9 2774.9,2124.9 P33.2
RB2: P33.3 U26.35 | length 1219.6
  Bottom Layer w10: U26.35 2094.9,1919.9 2724.05,1919.9 2739.05,1904.9 2846.05,1904.9 2870.05,1928.9 2870.05,2229.95 P33.3
RB3: P33.4 U26.36 | length 1256.6
  Top Layer w10: U26.36 2143.05,1868.05 2143.05,2265.9 v1(2207.05,2329.9)
  Bottom Layer w10: v1(2207.05,2329.9) 2779.9,2329.9 P33.4
RB4: P33.5 U26.37 | length 2553.5
  Top Layer w10: U26.37 2005.05,1719.95 2005.05,2512.9 2017.05,2524.9 2153.05,2524.9 2491.05,2862.9 2491.05,2968.9 2548.05,3025.9 2821.05,3025.9 2890.05,2956.9 2890.05,2540.05 P33.5
RC1: P34.1 U26.16 | length 322.5
  Top Layer w10: U26.16 2780.05,2744.95 2780.05,2669.95 P34.1
RC2: P34.2 U26.17 | length 322.5
  Top Layer w10: U26.17 2780.05,2844.95 2780.05,2780.9 2825,2735.94 P34.2
RD6: P34.3 U26.29 | length 1104
  Bottom Layer w10: U26.29 2345.95,2475 2394.05,2426.9 2673.05,2426.9 2695.05,2448.9 2695.05,2695.05 P34.3
RD7: P34.4 U26.30 | length 1420.8
  Top Layer w10: U26.30 2394.9,2719.9 2677.05,2719.9 2775.05,2621.9 2775.05,2580.9 2797.05,2558.9 2840.05,2558.9 2870.05,2588.9 2870.05,2879.95 P34.4
V+: P24.3 U24.4 | length 250.6
  Bottom Layer w10: U24.4 2066.08,499.41 2181.3,384.19 P24.3
V-: P24.2
VCC: C38.1 P28.2 P31.2 P31.6 P31.10 P31.14 P31.18 P31.22 P31.26 P31.30 R94.1 R95.1 R96.1 U24.5 U25.11 U25.32 U26.11 U26.32 U27.11 U27.32 | length 12346.9
  Top Layer w10: P31.14 35.47,1839.53 35.47,2130.18 57.05,2151.76 76.76,2151.76 P31.10 55.05,2219.95 55.05,2530.05 P31.6 55.05,2619.95 55.05,2930.05 P31.2 ; P31.30 260,1715 288.95,1715 305.05,1698.9 305.05,1610.47 245.05,1550.47 245.05,282.9 317.05,210.9 1410.9,210.9 1529.9,329.9 ; P28.2 1529.9,329.9 ; U27.11 1805.05,2330.05 1805.05,1441.9 1817.05,1429.9 1883.53,1429.9 1894.53,1418.9 1894.53,1330.47 1602.62,1330.47 1384.05,1111.9 1384.05,382.9 1437.05,329.9 1529.9,329.9
  Bottom Layer w10: P31.14 P31.30 ; P31.10 P31.26 U25.32 ; P31.6 P31.22 ; P31.2 P31.18 ; R94.1 993.51,688.98 1031.75,650.74 1248.89,650.74 1287.13,688.98 R95.1 1524.05,688.98 1574.13,638.9 ; U25.11 1147.15,2375 1192.05,2419.9 1300.05,2419.9 1374.05,2345.9 1374.05,2188.9 1360.15,2175 ; U27.32 1360.15,2175 ; P28.2 1575,638.02 1574.13,638.9 ; U24.5 U24.5@2028.05,550.59 ; C38.1 2041.55,862.4 2028.05,848.9 U24.5@2028.05,550.59 ; U26.11 2372.95,2375 2328.05,2419.9 1894.9,2419.9 U27.11 1885.47,2339.53 1897.05,2339.53 1918.79,2317.78 1918.79,2306.21 U26.32 1917.05,2042.05 1917.05,1964.9 1877.05,1924.9 1829.05,1924.9 1534.42,2219.53 1509.68,2219.53 1465.15,2175 1360.15,2175 ; 1574.13,638.9 1787.05,638.9 1837.13,688.98 R96.1 1955.97,688.98 2024.35,620.59 2024.35,550.59 U24.5@2028.05,550.59
VGND: C38.2 C40.2 C41.2 C42.2 C43.2 C44.2 C45.2 C46.2 C47.2 C48.2 P24.1 P27.1 P28.1 P29.1 P30.1 P31.1 P31.5 P31.9 P31.13 P31.17 P31.21 P31.25 P31.29 S7.2 S8.2 S9.2 U24.2 U25.12 U25.31 U26.12 U26.31 U27.12 U27.31 | length 17600.7
  Top Layer w10: P31.13 55.47,1919.53 55.47,2109.9 76.05,2130.47 144.05,2130.47 155.05,2141.47 155.05,2230.05 P31.25 ; P31.9 145.05,2320.05 145.05,2629.95 P31.5 145.05,2720.05 145.05,3029.95 P31.1 ; P31.29 250.1,1824.9 479.05,1824.9 495.05,1808.9 495.05,1748.9 466.05,1719.9 416.05,1719.9 350,1653.85 P30.1 ; U25.31 450,2307.9 577.05,2434.95 v1(577.05,2456.9) ; S7.2@927.17,566.73 927.17,846.78 ; S7.2@927.17,925 927.17,846.78 ; v1(966.05,807.9) 927.17,846.78 ; U27.31 1263.9,2288.9 1354.05,2288.9 1374.05,2268.9 1374.05,2217.07 1331.87,2174.9 1307.05,2174.9 1295.05,2162.9 1295.05,1998.9 1304.05,1989.9 1317.05,1989.9 1416.55,2089.4 1416.55,2288.4 1747.68,2619.53 1883.42,2619.53 1895.05,2607.9 1895.05,2488.9 1881.15,2475 U27.12 ; S8.2@1427.17,925 S8.2@1427.17,924.9 ; P28.1 1427.17,422.83 1427.17,566.73 S8.2@1427.17,924.9 ; S9.2@1952.17,566.73 1952.17,925 1952.17,968.9 ; U26.31 2394.53,2619.53 2683.9,2619.53 2694.53,2608.9 2694.53,2519.53 U26.12 2600.15,2475 2498.05,2372.9 2498.05,1660.9 2324.05,1486.9 2133.47,1486.9 2077.05,1430.47 2026.62,1430.47 2005.05,1408.9 2005.05,1284.9 1885.05,1164.9 1885.05,1060.02 1952.17,992.9 1952.17,968.9 ; P24.1 2575,500 P27.1 ; S8.2@1427.17,924.9 1682.05,924.9 1750.05,992.9 1928.17,992.9 1952.17,968.9
  Bottom Layer w10: P31.13 P31.29 ; P31.9 P31.25 U25.31 ; P31.5 P31.21 ; P31.1 P31.17 ; P30.1 591.19,1083.81 591.19,1046.85 C44.2 ; P29.1 450,680.35 557.05,787.4 C40.2 675,891.9 625,941.9 C44.2 ; v1(577.05,2456.9) 1031.9,2456.9 U25.12 ; v1(966.05,807.9) 1043.05,730.9 1111.7,730.9 1128.05,714.55 ; P28.1 1521.1,328.9 1904.05,328.9 1944.05,368.9 1944.05,509.9 1957.05,522.9 2059,522.9 2075,538.9 ; C42.2 1595.35,687.6 1544.05,738.9 1175,738.9 C41.2 1130,712.6 ; U27.12 1894.9,2519.9 2605.1,2519.9 U26.12 ; P24.1 2575,455.9 2505.9,525 U24.2 2075.05,525 2075,525.05 2075,538.9 ; C44.2 C43.2 C45.2@1128.05,1046.85 ; 1128.05,714.55 C45.2@1128.05,1046.85 ; 1128.05,714.55 1128.05,712.6 1130,712.6 ; 1128.05,714.55 1130,712.6 ; C45.2@1128.05,1046.85 C45.2 C46.2 1559.05,1046.85 1665.35,1153.15 C47.2 1813.05,1153.15 1919.35,1046.85 C48.2 2122.05,1046.85 2135.05,1033.85 2135.05,808.9 2113.75,787.6 C38.2 2075,538.9
pads on no net: P20.16 P21.16 P27.4 U24.1 U24.3 U25.6 U25.18 U25.35 U26.18 U27.6 U27.7 U27.18

## Polygon pours and split planes (outlines as drawn)
VGND on Bottom Layer "Bottom Overlay-No Net" (solid, pour order 7): 0,3900 3025,3900 3025,-25 0,-25 0,3900
VGND on Top Layer "Bottom Overlay-No Net" (solid, pour order 9): -2.95,3900 3025,3900 3025,-31.1 6.1,-31.1 0,-25 -2.95,-22.05 -2.95,3900

## Silkscreen, mask and mechanical layers (free items; w line width, h text height)
Top Overlay:
  text "MOTOR DRIVE 1" at 675,3800 h39.37
  text "MOTOR DRIVE 2" at 2000,3800 h39.37
  text "Dextra - McuPro" at 1968.5,3450.2 h118.11
  text "D7" at 2900,2900 h39.37
  text "D6" at 2900,2800 h39.37
  text "CCP RD" at 2750,2750 h39.37 r90
  text "ENCODER INPUT" at 275.59,2702.17 h39.37 r270
  text "C2" at 2900,2700 h39.37
  text "C1" at 2900,2600 h39.37
  text "B4" at 2900,2450 h39.37
  text "B3" at 2900,2350 h39.37
  text "PORT B" at 2750,2275 h39.37 r90
  text "B2" at 2900,2250 h39.37
  text "B1" at 2900,2150 h39.37
  text "B0" at 2900,2050 h39.37
  text "A5" at 2900,1925 h39.37
  text "A4" at 2900,1825 h39.37
  text "A3" at 2900,1725 h39.37
  text "PORT A" at 2750,1675 h39.37 r90
  text "A2" at 2900,1625 h39.37
  text "A1" at 2900,1525 h39.37
  text "A0" at 2900,1425 h39.37
  text "VGND" at 25,1350 h39.37
  text "PB 1" at 25,1250 h39.37
  text "PB 2" at 25,1150 h39.37
  text "PB 3" at 25,1050 h39.37
  text "PB 4" at 25,950 h39.37
  text "PB 5" at 25,850 h39.37
  text "PB 6" at 25,750 h39.37
  text "EMG INPUT" at 2952.76,733.66 h39.37 r90
  text "PB 7" at 25,650 h39.37
  text "PB 8" at 25,550 h39.37
  text "PB 9" at 25,450 h39.37
  text "PB 10" at 25,350 h39.37
  text "V+" at 2150,75 h39.37
  text "V-" at 2350,75 h39.37
  text "VGND" at 2500,75 h39.37
  text "VGND" at 425,50 h39.37 r90
  text "FSR 1" at 525,50 h39.37 r90
  text "FSR 2" at 625,50 h39.37 r90
  text "FSR 3" at 725,50 h39.37 r90
  text "FSR 4" at 825,50 h39.37 r90
  text "FSR 5" at 925,50 h39.37 r90
  text "FSR 6" at 1025,50 h39.37 r90
  text "FSR 7" at 1125,50 h39.37 r90
  text "FSR 8" at 1225,50 h39.37 r90
  text "VGND" at 1450,50 h39.37 r90
  text "VCC" at 1550,50 h39.37 r90
  text "ACC X" at 1650,50 h39.37 r90
  text "ACC Y" at 1750,50 h39.37 r90
  text "ACC Z" at 1850,50 h39.37 r90
Bottom Overlay:
  text "J. Alvarez 2011" at 2700,75 h100

## Text inside footprints (layer, text, board x,y; h text height)
P20: Top Overlay "9" at 1494.09,3642.32 h50 r180; Top Overlay "1" at 1482.28,3748.62 h50 r180; Top Overlay "8" at 340.55,3740.75 h50 r180; Top Overlay "16" at 344.49,3642.32 h50 r180
P21: Top Overlay "9" at 2794.09,3642.32 h50 r180; Top Overlay "1" at 2782.28,3748.62 h50 r180; Top Overlay "8" at 1640.55,3740.75 h50 r180; Top Overlay "16" at 1644.49,3642.32 h50 r180
P27: Top Overlay "6" at 2746.26,1159.45 h50 r90; Top Overlay "3" at 2852.56,1159.45 h50 r90; Top Overlay "1" at 2856.5,525.59 h50 r90; Top Overlay "4" at 2742.32,509.84 h50 r90
P31: Top Overlay "32" at 180,1515 h50 r270; Top Overlay "16" at 80,1515 h50 r270; Top Overlay "1" at 80,3175 h50 r270; Top Overlay "17" at 180,3215 h50 r270